# Altium PCB DCF-ECU.PcbDoc
Units mil, origin at the board's own origin, x right, y up, seen from the top; angles counter-clockwise.
Board outline 18240 x 10360 mil, 4 copper layers (Top Layer, GND, Layer 2, Bottom Layer), stack 23.756 mil thick; 22 components, 29 nets, 198 pads, 0 vias.
Unrouted connection lines stored in the file: 68.
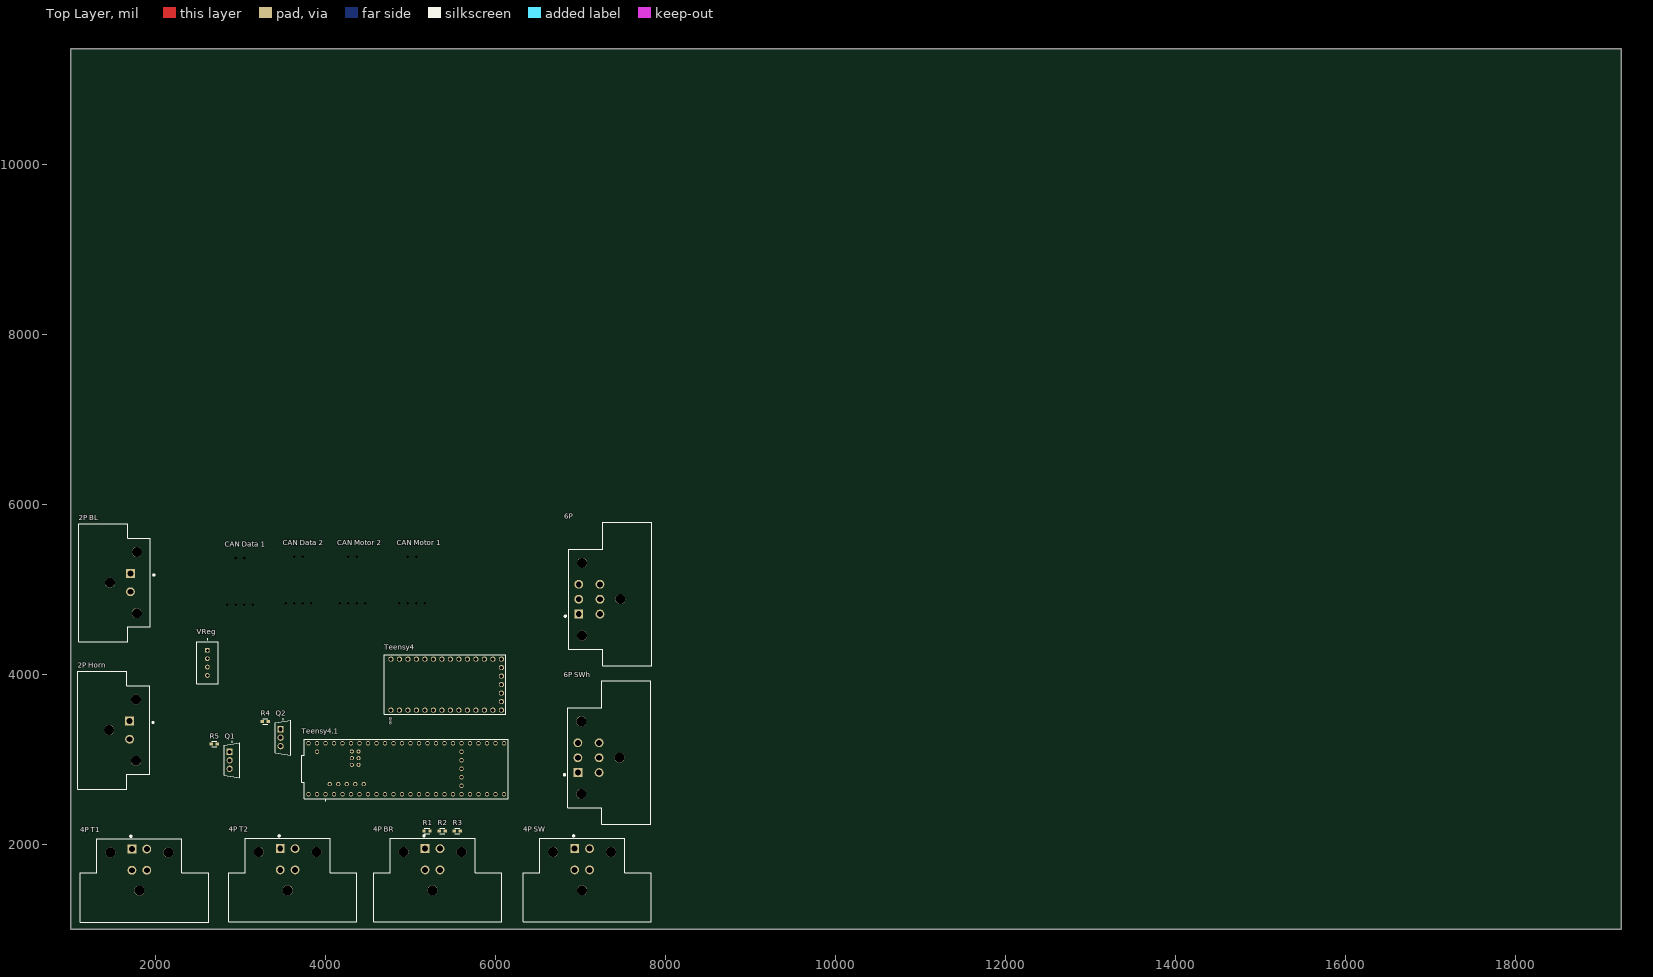
[diagram p0: Top Layer view]
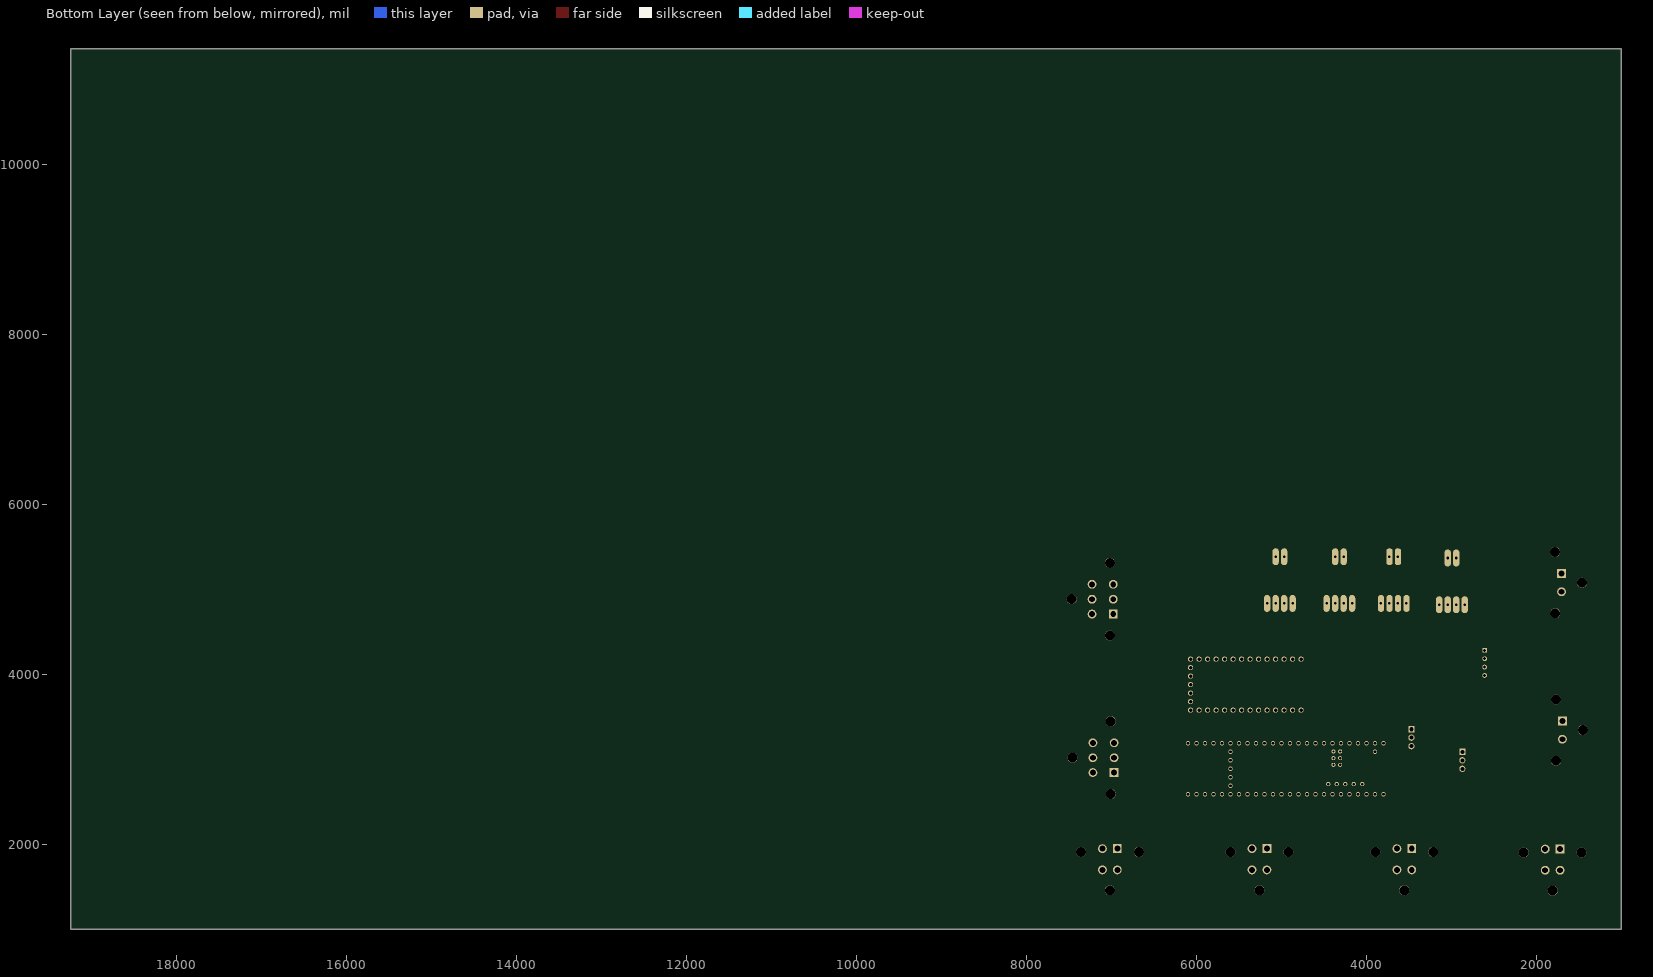
[diagram p1: Bottom Layer view, seen from below]

## Layer stack, top to bottom
Top Solder: solder mask 0.4, Solder Resist, Dk 3.5
Top Layer: signal copper 1.4
Dielectric 2: prepreg 2.8, PP-006, Dk 4.1
GND: signal copper 1.378
Dielectric 1: dielectric 12.6, FR-4, Dk 4.8
Layer 2: signal copper 1.378
Dielectric 3: prepreg 2.8, PP-006, Dk 4.1
Bottom Layer: signal copper 1.4
Bottom Solder: solder mask 0.4, Solder Resist, Dk 3.5

## Board outline
1000,1000 19240,1000 19240,11360 1000,11360

## Design rules (kind name [scope] priority, off if disabled: settings)
Clearance [All] p1: gap=10 ignorepadtopadclearanceinfootprint=FALSE
PolygonConnect [All] p1: connectstyle=Relief reliefconductorwidth=10 reliefentries=4 polygonreliefangle="90 Angle" airgapwidth=10
RoutingVias [All] p1: holewidth=28 width=50 viastyle="Through Hole" minholewidth=28 minwidth=50 maxholewidth=28 maxwidth=50
SolderMaskExpansion [All] p1: expansion=4 istentingtop=FALSE
SupplyNets "Schematic Supply Nets" [InNet('GND')] p1: voltage=0.000
Width [All] p1: maxlimit=10 minlimit=10 preferedwidth=10
30 further rules are at their usual default settings.

## Components (designator, comment, footprint, x,y, rotation, side; value= is the part's Value field where it differs from the comment)
"2P BL" "DT13-2P" TE_DT13-2P 1700.16,5080 r0 top
"2P Horn" "DT13-2P" TE_DT13-2P 1690.16,3345 r0 top
"4P BR" "DT13-4P" TE_DT13-4P 5255,1700.16 r90 top
"4P SW" "DT13-4P" TE_DT13-4P 7015,1700.16 r90 top
"4P T1" "DT13-4P" TE_DT13-4P 1805,1695.16 r90 top
"4P T2" "DT13-4P" TE_DT13-4P 3550,1700 r90 top
6P "DT13-6P" TE_DT13-6P 7225,4885.2 r180 top
"6P SWh" "DT13-6P" TE_DT13-6P 7214.84,3020 r180 top
"CAN Data 1" "CAN Module" "CAN Module-Footprint-1" 3140,4820 r90 top
"CAN Data 2" "CAN Module" "CAN Module-Footprint-1" 3825,4835 r90 top
"CAN Motor 1" "CAN Module" "CAN Module-Footprint-1" 5165,4835 r90 top
"CAN Motor 2" "CAN Module" "CAN Module-Footprint-1" 4465,4835 r90 top
Q1 "IRLZ44NPbF" FP-PG-TO220-3-MFG 2895,2990 r0 top
Q2 "IRLZ44NPbF" FP-PG-TO220-3-MFG 3495,3255 r0 top
R1 "RP73D1J10KBTDG" FP-RP731J-MFG 5190,2160 r0 top value=10KΩ
R2 "RP73D1J10KBTDG" FP-RP731J-MFG 5370,2160 r0 top value=10KΩ
R3 "RP73D1J10KBTDG" FP-RP731J-MFG 5545,2160 r0 top value=10KΩ
R4 "RP73D1J10KBTDG" FP-RP731J-MFG 3285,3445 r0 top value=10KΩ
R5 "RP73D1J10KBTDG" FP-RP731J-MFG 2685,3180 r0 top value=10KΩ
Teensy4 "DEV-15583" MODULE_DEV-15583 5415,3880 r90 top
Teensy4.1 "DEV-16771" MODULE_DEV-16771 4945,2890 r0 top
VReg "B04B-XASK-1(LF)(SN)" FP-B04B-XASK-1_LF_SN-MFG 2605,4135.79 r90 top

## Footprints (in the part's own frame and the unit in brackets; to place one, negate y for a bottom-side part, rotate by r counter-clockwise, add the part's x,y. Pads: shape width x height; smd on the part's side, far side on the other; paste and mask are expansions set on the pad)
"CAN Module-Footprint-1" [mil]
  round 0 / inner round 60 / far side oval 200x75 hole 30: 1(0,300) 2(0,200) 3(0,100) 4(0,0) 5(550,200) 6(550,100)
FP-B04B-XASK-1_LF_SN-MFG [mm]
  rect 1.4x1.4 hole 0.9 paste-2539.97 mask+0: 1(3.75,0)
  round 1.4 hole 0.9 paste-2539.97 mask+0: 2(1.25,0) 3(-1.25,0) 4(-3.75,0)
  silkscreen extent -6.25,-3.2 7.15,3.2, body extent -6.35,-3.3 6.35,3.3, height 0.25
FP-PG-TO220-3-MFG [mm]
  rect 1.85x1.85 hole 1.2 paste-2539.97 mask+0: 1(-0.705,2.54)
  round 1.85 hole 1.2 paste-2539.97 mask+0: 2(-0.705,0) 3(-0.705,-2.54)
  silkscreen extent -2.27,-5.2 2.27,5.62, body extent -2.37,-5.55 2.37,5.55, height 0.25
FP-RP731J-MFG [mm]
  rect 1x0.9 smd paste+0 mask+0: 1(-0.9,0) 2(0.9,0)
  silkscreen extent -0.77,-0.82 0.77,0.82, body extent -1.5,-0.55 1.5,0.55, height 0.25
MODULE_DEV-15583 [mm]
  round 1.53 hole 1.02: 0(-7.62,13.97) 1(-7.62,11.43) 2(-7.62,8.89) 3(-7.62,6.35) 3.3V_1(-2.54,-16.51) 3.3V_2(7.62,11.43) 4(-7.62,3.81) 5(-7.62,1.27) 6(-7.62,-1.27) 7(-7.62,-3.81) 8(-7.62,-6.35) 9(-7.62,-8.89) 10(-7.62,-11.43) 11(-7.62,-13.97) 12(-7.62,-16.51) 13(7.62,-16.51) 14(7.62,-13.97) 15(7.62,-11.43) 16(7.62,-8.89) 17(7.62,-6.35) 18(7.62,-3.81) 19(7.62,-1.27) 20(7.62,1.27) 21(7.62,3.81) 22(7.62,6.35) 23(7.62,8.89) G1(-7.62,16.51) G2(0,-16.51) G3(7.62,13.97) ON-OFF(5.08,-16.51) PGM(2.54,-16.51) VBAT(-5.08,-16.51) VIN(7.62,16.51)
  silkscreen extent -8.89,-17.78 8.89,18.48
MODULE_DEV-16771 [mm]
  round 1.308 hole 0.8: 0(-26.67,-7.62) 1(-24.13,-7.62) 2(-21.59,-7.62) 3(-19.05,-7.62) 3.3V_1(6.35,-7.62) 3.3V_2(-24.13,7.62) 3.3V_3(16.51,-2.54) 4(-16.51,-7.62) 5(-13.97,-7.62) 6(-11.43,-7.62) 7(-8.89,-7.62) 8(-6.35,-7.62) 9(-3.81,-7.62) 10(-1.27,-7.62) 11(1.27,-7.62) 12(3.81,-7.62) 13(3.81,7.62) 14(1.27,7.62) 15(-1.27,7.62) 16(-3.81,7.62) 17(-6.35,7.62) 18(-8.89,7.62) 19(-11.43,7.62) 20(-13.97,7.62) 21(-16.51,7.62) 22(-19.05,7.62) 23(-21.59,7.62) 24(8.89,-7.62) 25(11.43,-7.62) 26(13.97,-7.62) 27(16.51,-7.62) 28(19.05,-7.62) 29(21.59,-7.62) 30(24.13,-7.62) 31(26.67,-7.62) 32(29.21,-7.62) 33(29.21,7.62) 34(26.67,7.62) 35(24.13,7.62) 36(21.59,7.62) 37(19.05,7.62) 38(16.51,7.62) 39(13.97,7.62) 40(11.43,7.62) 41(8.89,7.62) GND1(-29.21,-7.62) GND2(6.35,7.62) GND3(-26.67,7.62) GND4(16.51,0) ON/OFF(16.51,5.08) PROGRAM(16.51,2.54) VBAT(16.51,-5.08) VIN(-29.21,7.62) VUSB(-26.67,5.08)
  round 1.258 hole 0.75: 5V(-22.86,-4.57) D+(-17.78,-4.57) D-(-20.32,-4.57) USB_GND1(-15.24,-4.57) USB_GND2(-12.7,-4.57)
  round 1.208 hole 0.7: GND5(-14.24,3.17) LED(-16.24,3.17) R+(-16.24,5.17) R-(-14.24,5.17) T+(-14.24,1.17) T-(-16.24,1.17)
  silkscreen extent -31.18,-9.6 30.48,8.89, body extent -31.18,-8.89 30.48,8.89, height 7.15
TE_DT13-2P [mm]
  rect 2.64x2.64 hole 1.76: 1(0,2.73)
  round 2.64 hole 1.76: 2(0,-2.73)
  round 2.99 hole 2.99 unplated: ""(-6.1,0) ""(1.9,-9.155) ""(1.9,9.155)
  silkscreen extent -15.5,-17.65 7.25,17.65
TE_DT13-4P [mm]
  rect 2.64x2.64 hole 1.76: 1(6.35,2.225)
  round 2.64 hole 1.76: 2(6.35,-2.225) 3(0,-2.225) 4(0,2.225)
  round 2.99 hole 2.99 unplated: ""(-6.1,0) ""(5.33,8.65) ""(5.33,-8.65)
  silkscreen extent -15.5,-20.71 10.41,17.64
TE_DT13-6P [mm]
  rect 2.64x2.64 hole 1.76: 1(6.35,4.45)
  round 2.64 hole 1.76: 2(6.35,0) 3(6.35,-4.45) 4(0,-4.45) 5(0,0) 6(0,4.45)
  round 2.99 hole 2.99 unplated: ""(-6.1,0) ""(5.33,10.87) ""(5.33,-10.87)
  silkscreen extent -15.5,-22.93 10.61,19.87

## Part data
"2P BL" "2P Horn": "DT13 Series, 5.46mm Pitch 2 Way 1 Row Right Angle PCB Header, Solder Termination", Package=None, Availability=Unavailable, DigiKey-Purchase-URL=https://snapeda.com/shop?store=DigiKey&id=1788306, EU_RoHS_Compliance=Compliant, MF="TE Connectivity", MP=DT13-2P, Price=None, SnapEDA_Link=https://www.snapeda.com/parts/DT13-2P/TE%20Connectivity%20Deutsch%20Connectors/view-part/1788306/?ref=snap
"4P BR" "4P SW" "4P T1" "4P T2": "DT13 Series, 4.44mm Pitch 4 Way 2 Row Right Angle PCB Header, Solder Termination", Package=None, Availability=Unavailable, MF="TE Connectivity", MP=DT13-4P, Price=None, SnapEDA_Link=https://www.snapeda.com/parts/DT13-4P/TE%20Connectivity%20Deutsch%20Connectors/view-part/2708791/?ref=snap, TE_purchase_URL=https://www.te.com/usa-en/product-DT13-4P.html?te_bu=Cor&te_type=disp&te_campaign=seda_glo_cor-seda-global-disp-prtnr-fy19-seda-model-bom-cta_sma-317_1&elqCampaignId=32493
6P "6P SWh": "DT13 Series, 4.44mm Pitch 6 Way 2 Row Right Angle PCB Header, Solder Termination", Package=None, Availability=Unavailable, DigiKey-Purchase-URL=https://snapeda.com/shop?store=DigiKey&id=1897474, EU_RoHS_Compliance=Compliant, MF="TE Connectivity", MP=DT13-6P, Price=None, SnapEDA_Link=https://www.snapeda.com/parts/DT13-6P/TE%20Connectivity%20Deutsch%20Connectors/view-part/1897474/?ref=snap
"CAN Data 1" "CAN Data 2" "CAN Motor 1" "CAN Motor 2": library part CMP-00030-00003-1, "CAN waveshare"
Q1 Q2: library part CMP-32901-000488-1, "MOSFET N-CH 55V 47A TO220AB", Case/Package=TO-220, Continuous Drain Current (ID)=47A, Drain to Source Breakdown Voltage=55V, Drain to Source Resistance=35mR, Gate to Source Voltage (Vgs)=16V, Input Capacitance=1.7nF, Max Operating Temperature=175°C, Max Power Dissipation=110W, Min Operating Temperature=-55°C, Threshold Voltage=2V, Drain to Source Voltage (Vdss)=55V, Element Configuration=Single, Halogen Free="Halogen Free", Height=0.6inch, Lead Free="Lead Free", Length=0.414inch, Max Dual Supply Voltage=55V, Mount="Through Hole", Number of Pins=3, Packaging=Rail/Tube, Power Dissipation=110W, Rds On Max=22mR, REACH SVHC="No SVHC", RoHS Compliant=Yes, Turn-Off Delay Time=26ns, Turn-On Delay Time=11ns, Width=0.185inch
R1 R2 R3 R4 R5: library part CMP-03211-006887-1, "TE CONNECTIVITY / HOLSWORTHY SMD Chip Resistor, Thin Film, 10KΩ, 50 V, 0603 [1608 Metric], 100 mW, 0.1% , RP73 Series", Manufacturer="TE Connectivity", Package=RP731J, Power Rating=0.1W, Resistance=10KΩ, Temperature="-55°C to +105°C", Temperature Coefficient=15ppm/°C, Temperature Range High=+105°C, Temperature Range Low=-55°C, Tolerance=0.1%, Voltage Rating=75V, Automotive=No, Category=Res, ComponentLink2Description=Datasheet, ComponentLink2URL=https://www.te.com/commerce/DocumentDelivery/DDEController?Action=srchrtrv&DocNm=1773272&DocType=DS&DocLang=English, Composition="Thin Film", Device Class L1="Passive Components", Device Class L2=Resistors, Device Class L3="Chip SMD Resistors", Height=0.55mm, Ipc Land Pattern Name=RESC15580X45, Lead Free=Yes, Manufacturer Part Number=RP73D1J10KBTDG, Octopart=https://octopart.com/rp73d1j10kbtdg-te+connectivity-42631518, octopart_url=https://octopart.com/rp73d1j10kbtdg-te+connectivity-42631518, Packaging="cut tape", RoHS=TRUE, Series=RP73
Teensy4: "RT1062 Teensy 4.0 i.MX ARMÂ® CortexÂ®-M7 MPU Embedded Evaluation Board", Package=None, Digi-Key_Part_Number=1568-DEV-15583-ND, Digi-Key_Purchase_URL=https://www.digikey.com/product-detail/en/sparkfun-electronics/DEV-15583/1568-DEV-15583-ND/10384551?utm_source=snapeda&utm_medium=aggregator&utm_campaign=symbol, MF="SparkFun Electronics", MP=DEV-15583, SnapEDA_Link=https://www.snapeda.com/parts/DEV-15583/SparkFun%20Electronics/view-part/4001229/?ref=snap
Teensy4.1: "RT1062 Teensy 4.1 series ARM® Cortex®-M7 MPU Embedded Evaluation Board", Package=None, Check_prices=https://www.snapeda.com/parts/DEV-16771/SparkFun+Electronics/view-part/?ref=eda, MF="SparkFun Electronics", MP=DEV-16771, SnapEDA_Link=https://www.snapeda.com/parts/DEV-16771/SparkFun+Electronics/view-part/?ref=snap
VReg: library part CMP-17439-000018-1, "CONN HEADER VERT 4POS 2.5MM", Current Rating=3A, Manufacturer=JST, Temperature="-25°C to +85°C", Temperature Range High=+85°C, Temperature Range Low=-25°C, Voltage Rating=250V, Automotive=No, Category=Conn, ComponentLink2Description=Datasheet, ComponentLink2URL=http://www.jst-mfg.com/product/pdf/eng/eXA1.pdf, Conn Gender=Male, Conn Orientation=Straight, Contact Material=Tin,Copper, Device Class L1=Connectors, Device Class L2="Headers and Wire Housings", Device Class L3=unset, Digikey Description="CONN HEADER VERT 4POS 2.5MM", Height=8.8mm, Lead Free=Yes, Manufacturer Part Number=B04B-XASK-1(LF)(SN), Number Of Contacts=4, Number Of Rows=1, Octopart=https://octopart.com/b04b-xask-1%28lf%29%28sn%29-jst-3990149, Package=B04B-XASK-1(LF)(SN), Pitch=2.5mm, RoHS=TRUE

## Nets (pads, with @x,y where several pads share a name; then routed paths per layer and width w, separated by ;. In a path a pad name is that pad's centre, name@x,y a point inside that pad or via, vN(x,y) a via of type N, cw(c..) or ccw(c..) an arc to the next point about the centre after c; other vN are vias at no path point)
3.3V: "4P BR.2" "4P SW.2" "4P T1.2" "4P T2.2" "CAN Data 1.4" "CAN Data 2.4" "CAN Motor 1.4" "CAN Motor 2.4" Teensy4.1.3.3V_1 Teensy4.3.3V_2
5V: Teensy4.1.5V Teensy4.1.VIN Teensy4.VIN VReg.2
12V: 6P.2 "2P BL.1" "2P Horn.1" "6P SWh.2"
A1: "4P T1.3" R1.1 Teensy4.1.24
A2: "4P T2.3" R2.1 Teensy4.1.25
A3: "4P BR.3" R3.1 Teensy4.1.26
A4: "4P SW.3" Teensy4.1.27
A5: "6P SWh.3" Teensy4.17
A6: "6P SWh.4" Teensy4.16
A7: "6P SWh.6" Teensy4.14
"BL IN": "2P BL.2" Q2.2
CANH1: 6P.3 "CAN Motor 1.5" "CAN Motor 2.5"
CANH2: 6P.5 "CAN Data 1.5" "CAN Data 2.5"
CANL1: 6P.4 "CAN Motor 1.6" "CAN Motor 2.6"
CANL2: 6P.6 "CAN Data 1.6" "CAN Data 2.6"
CRX1A: "CAN Data 1.1" Teensy4.23
CRX1B: "CAN Motor 1.2" Teensy4.1.23
CRX2A: "CAN Data 2.2" Teensy4.0
CRX2B: "CAN Motor 2.1" Teensy4.1.0
CTX1A: "CAN Data 1.2" Teensy4.22
CTX1B: "CAN Motor 1.1" Teensy4.1.22
CTX2A: "CAN Data 2.1" Teensy4.1
CTX2B: "CAN Motor 2.2" Teensy4.1.1
D1: "4P SW.4" Teensy4.1.14
D2: Q1.1 R5.2 Teensy4.1.15
D3: Q2.1 R4.2 Teensy4.1.16
GND: 6P.1 "4P BR.1" "4P SW.1" "4P T1.1" "4P T2.1" "6P SWh.1" "CAN Data 1.3" "CAN Data 2.3" "CAN Motor 1.3" "CAN Motor 2.3" Q1.3 Q2.3 R1.2 R2.2 R3.2 R4.1 R5.1 Teensy4.1.GND1 Teensy4.G1 VReg.1
"HORN IN": "2P Horn.2" Q1.2
RX1: "6P SWh.5" Teensy4.15
pads on no net: 6P. "2P BL." "2P Horn." "4P BR.4" "4P BR." "4P SW." "4P T1.4" "4P T1." "4P T2.4" "4P T2." "6P SWh." Teensy4.1.2 Teensy4.1.3 Teensy4.1.3.3V_2 Teensy4.1.3.3V_3 Teensy4.1.4 Teensy4.1.5 Teensy4.1.6 Teensy4.1.7 Teensy4.1.8 Teensy4.1.9 Teensy4.1.10 Teensy4.1.11 Teensy4.1.12 Teensy4.1.13 Teensy4.1.17 Teensy4.1.18 Teensy4.1.19 Teensy4.1.20 Teensy4.1.21 Teensy4.1.28 Teensy4.1.29 Teensy4.1.30 Teensy4.1.31 Teensy4.1.32 Teensy4.1.33 Teensy4.1.34 Teensy4.1.35 Teensy4.1.36 Teensy4.1.37 Teensy4.1.38 Teensy4.1.39 Teensy4.1.40 Teensy4.1.41 Teensy4.1.D+ Teensy4.1.D- Teensy4.1.GND2 Teensy4.1.GND3 Teensy4.1.GND4 Teensy4.1.GND5 Teensy4.1.LED Teensy4.1.ON/OFF Teensy4.1.PROGRAM Teensy4.1.R+ Teensy4.1.R- Teensy4.1.T+ Teensy4.1.T- Teensy4.1.USB_GND1 Teensy4.1.USB_GND2 Teensy4.1.VBAT Teensy4.1.VUSB Teensy4.2 Teensy4.3 Teensy4.3.3V_1 Teensy4.4 Teensy4.5 Teensy4.6 Teensy4.7 Teensy4.8 Teensy4.9 Teensy4.10 Teensy4.11 Teensy4.12 Teensy4.13 Teensy4.18 Teensy4.19 Teensy4.20 Teensy4.21 Teensy4.G2 Teensy4.G3 Teensy4.ON-OFF Teensy4.PGM Teensy4.VBAT VReg.3 VReg.4

## Text inside footprints (layer, text, board x,y; h text height)
Teensy4: Top Overlay "GND" at 4775,3405 h32 r90; Mechanical 13 "GND" at 4775,3405 h32 r90
Teensy4.1: Mechanical 13 "Teensy 4.1" at 4935.16,2903.39 h50